# Altium PCB DIOT_Sampler.PCBDOC (part 3 of 8)
Units mm, origin at the board's own origin, x right, y up, seen from the top; angles counter-clockwise.
Board outline 221.17 x 100 mm, 4 copper layers (Top, GP1(GND), L3, Bot), stack 1.648 mm thick; 666 components, 413 nets, 2132 pads, 925 vias.
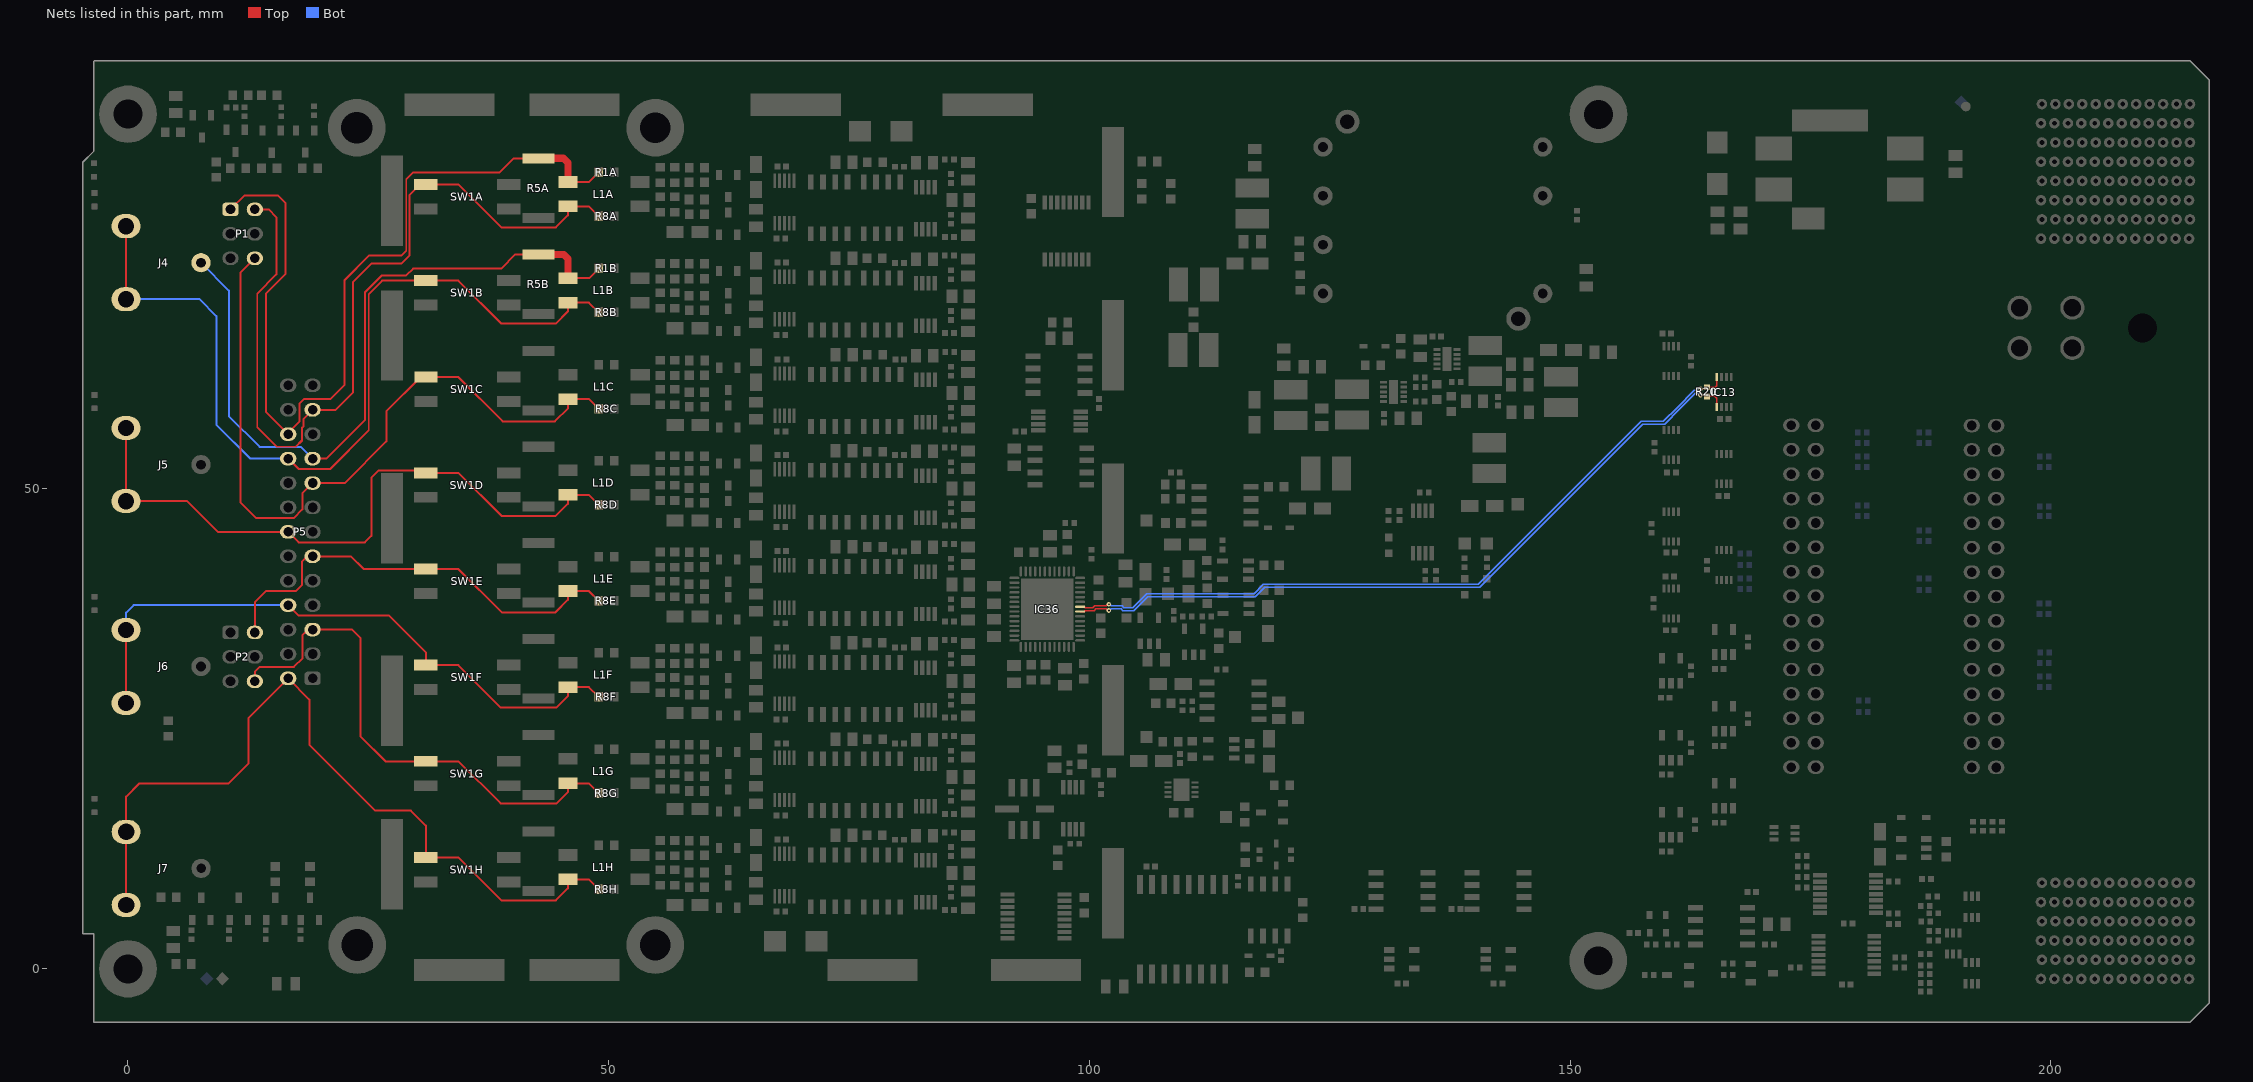
[diagram p4: the nets of this part, all layers, seen from the top]

## Part data (continued)
IC24: library part CMP-0476-00219-1, "200 mA, Low Noise, Low Dropout Negative Micropower Regulator, -1.9 to -20 V Vin, Adjustable Vout, 8-pin SON (DD-8), -40 to 125 degC, Pb-Free", Dropout Voltage(V)=0.34, Manufacturer="Linear Technology", Output Voltage=Adj, Shutdown Current(uA)=3, Code_JEDEC=MO-229, ComponentLink1Description="Manufacturer URL", ComponentLink1URL=http://www.linear.com/, ComponentLink2Description=Datasheet, ComponentLink2URL=http://cds.linear.com/docs/en/datasheet/1964fb.pdf, ComponentLink3Description="Package Specification", ComponentLink3URL=http://cds.linear.com/docs/en/packaging/DFN_8_05-08-1698.pdf, DatasheetVersion="Rev. B", Discrete Pass Element=no, Iout(mA)=200, Isupply(mA)=0.03, Mounting Technology="Surface Mount", Noise(uV)=30, Number of Outputs=1, PackageDescription="8-Pin Plastic DFN, Body 3 x 3 mm, Pitch 0.5 mm", PackageReference=DD-8, PackageVersion=Jun-10, PartNumber=LT1964EDD#PBF, PSRR(dB)=54, RoHS=TRUE, Vin Max(V)=-1.9, Vin Min(V)=-20, Vout Max(V)=-1.22, Vout Min(V)=-20
IC25: library part DC/DC_CC6-1212DF-E, "CONV DC/DC 6W DUAL 12V +-12V PCB", Manufacturer="TDK-Lambda Americas Inc.", Author=GK, Bonding=No, ComponentHeight=10.45mm, Component Type=Standard, CreateDate=17.12.2016, Device=CC6-1212DF-E, LatestRevisionDate=17.12.2016, Manufacturer Part Number=CC6-1212DF-E, Mounted=Yes, PackageDescription="CC6 Series, Body 0.900 x 0.831 x 0.335, Regulated", Part Description="CONV DC/DC 6W DUAL 12V +-12V PCB", Part Number=CC6-1212DF-E, Pin Count=7, PressFit=No, Sense=No, SMD=No, Socket=No
IC26: "200mA, Low Noise, Low Dropout Negative Micropower Regulator", Case=SOT23-5, Manufacturer="LINEAR TECHNOLOGY", Author="CERN DEM JLC", Bonding=No, ComponentHeight=1mm, Component Type=Standard, CreateDate=05.05.2009, Device=LT1964ES5-SD#TRMPBF, HelpURL=\\cern.ch\dfs\Applications\Altium\Datasheets\LT1964ES5-SD#TRMPBF.pdf, LatestRevisionDate=05.05.2009, Manufacturer Part Number=LT1964ES5-SD#TRMPBF, Mounted=Yes, PackageDescription="SOT23, 0.95mm pitch; 5 pin, 1.75mm W X 3.00mm L, IPC Medium Density", Part Description="-1.22V to -20V, 200mA, Low Noise, Low Dropout Negative Micropower Regulator", Part Number=LT1964ES5-SD#TRMPBF, Pin Count=5, PressFit=No, Sense=No, SMD=Yes, Socket=No
IC27: "Dual Operational Amplifier", Case=SOIC8, Manufacturer="TEXAS INSTRUMENTS", Author="CERN DEM JLC", Bonding=No, ComponentHeight=1.75mm, Component Type=Standard, CreateDate=22.10.2013, Device=LM393AD, HelpURL=\\cern.ch\dfs\Applications\Altium\Datasheets\LM393AD.pdf, LatestRevisionDate=22.10.2013, Manufacturer Part Number=LM393AD, Mounted=Yes, PackageDescription="SOIC 8, Pitch 1.27mm - Body 4x5mm, IPC Medium Density", Part Description="Dual Differential Comparator", Part Number=LM393AD, Pin Count=8, PressFit=No, Sense=No, SMD=Yes, Socket=No
IC28 IC31: "4.75-28VDC to 1-6VDC, 500mA Step-Down Converter With Sleep Mode", Case=SON10, Manufacturer="TEXAS INSTRUMENTS", Author="CERN DEM JMW", Bonding=No, ComponentHeight=0.8mm, Component Type=Standard, CreateDate=11.08.2015, Device=TPS62175DQC, HelpURL=\\cern.ch\dfs\Applications\Altium\Datasheets\TPS62175DQC.pdf, LatestRevisionDate=11.08.2015, Manufacturer Part Number=TPS62175DQC, Mounted=Yes, PackageDescription="SON, 10-Leads, Body 2x3mm, Pitch 0.5mm, Thermal Pad 0.94x2.5mm, IPC Medium Density", Part Description="4.75-28VDC to 1-6VDC, 500mA Step-Down Converter With Sleep Mode", Part Number=TPS62175DQC, Pin Count=11, PressFit=No, Sense=No, SMD=Yes, Socket=No
IC33: library part REF_LTC6655CHLS8-4.096, "4.096, 1uA Precision Voltage Reference", Case=8-CLCC, Manufacturer="LINEAR TECHNOLOGY", Manufacturer Part Number=LTC6655CHLS8-4.096#PBF, Author=GK, Bonding=No, Component Type=Standard, ComponentHeight=1mm, CreateDate=2011-10-10, Device=LTC6655CHLS8-4.096, HelpURL=\\cern.ch\dfs\Applications\Altium\Datasheets\LT6656ACS6-3.3#TRMPBF.pdf, LatestRevisionDate=2011-10-10, Mounted=Yes, PackageDescription="LCC, 8-Pins, Body 5,00x5,00mmx1,45mm, Pitch 1,27mm, IPC Medium Density", Part Description="4.096V, 0.05%, 10ppm/°C, 1uA Precision Voltage Reference", Part Number=LTC6655CHLS8-4.096#PBF, Pin Count=8, PressFit=No, Sense=No, SMD=Yes, Socket=No
IC34: library part REF_LTC6655, "0.25ppm Noise, Low Drift Precision Buffered Voltage Reference", Case=SSOP8, Manufacturer="LINEAR TECHNOLOGY", Author=GK, Bonding=No, ComponentHeight=1.1mm, Component Type=Standard, CreateDate=07.06.2012, Device=LTC6655BHMS8-4.096#PBF, HelpURL=\\cern.ch\dfs\Applications\Altium\Datasheets\LTC6655BHMS8-5#PBF.pdf, LatestRevisionDate=07.06.2012, Manufacturer Part Number=LTC6655BHMS8-4.096#PBF, Mounted=Yes, PackageDescription="SOP, 8-Leads, Body 3.1x3.1mm (max), Pitch 0.65mm, IPC Medium Density", Part Description="4.096V, 0.25ppm Noise, Low Drift Precision Buffered Voltage Reference", Part Number=LTC6655BHMS8-4.096#PBF, Pin Count=8, PressFit=No, Sense=No, SMD=Yes, Socket=No
IC36: library part ADC_LTC2320HUKG-16, "Octal, 16-Bit, 1.5Msps/Ch  Simultaneous Sampling ADC", Case=QFP48, Manufacturer="LINEAR TECHNOLOGY", Author=GK, Bonding=No, ComponentHeight=0.8, Component Type=Standard, CreateDate=10.01.2017, Device=LTC2320HUKG-16#PBF, HelpURL=\\cern.ch\dfs\Applications\Altium\Datasheets\LTC2335CLX-18#PBF.pdf, LatestRevisionDate=10.01.2017, Manufacturer Part Number=LTC2320HUKG-16#PBF, Mounted=Yes, PackageDescription="QFN, 52-Leads, Body 7.00x8.00mm, Pitch 0.50mm, Thermal Pad 5.41x6.40mm, IPC Low Density", Part Description="Octal, 16-Bit, 1.5Msps/Ch  Simultaneous Sampling ADC", Part Number=LTC2320HUKG-16#PBF, Pin Count=48, PressFit=No, Sense=No, SMD=Yes, Socket=No
IC37 IC46: Case=TSSOP14, Manufacturer="NXP SEMICONDUCTORS", Author="CERN DEM JLC", Bonding=No, Component Type=Standard, ComponentHeight=1.1mm, CreateDate=2014-11-19, Device=74HC4066PW, HelpURL=\\cern.ch\dfs\Applications\Altium\Datasheets\74HC4066PW.pdf, LatestRevisionDate=2014-11-19, Manufacturer Part Number=74HC4066PW, Mounted=Yes, PackageDescription="SOP, 14-Leads, Body 4.4x5mm (max), Pitch 0.65mm, IPC Medium Density", Part Description="Quad Single-Pole Single-Throw Analog Switch", Part Number=74HC4066PW, Pin Count=14, PressFit=No, SMD=Yes, Socket=No, Table="Standard Logic"
IC39: "LinCMOS Timer", Case=SOIC8, Manufacturer="TEXAS INSTRUMENTS", Author="CERN DEM JMW", Bonding=No, Component Type=Standard, ComponentHeight=1.75mm, CreateDate=23.08.2016, Device=TLC555ID, HelpURL=\\cern.ch\dfs\Applications\Altium\Datasheets\TLC555ID.pdf, LatestRevisionDate=23.08.2016, Manufacturer Part Number=TLC555ID, Mounted=Yes, PackageDescription="SOIC 8, Pitch 1.27mm, Body 4x5mm, IPC Medium Density", Part Description="LinCMOS Timer", Part Number=TLC555ID, Pin Count=8, PressFit=No, Sense=No, SMD=Yes, Socket=No
IC40: "Digital Temperature Sensor and Thermal Watchdog with Two-Wire Interface", Case=SSOP8, Manufacturer="TEXAS INSTRUMENTS", Author="CERN DEM JLC", Bonding=No, Component Type=Standard, ComponentHeight=1.09mm, CreateDate=15.10.2012, Device=LM75AIMM/NOPB, HelpURL=\\cern.ch\dfs\Applications\Altium\Datasheets\LM75AIMM-NOPB.pdf, LatestRevisionDate=15.10.2012, Manufacturer Part Number=LM75AIMM/NOPB, Mounted=Yes, PackageDescription="SOP, 0.65mm pitch; 8 pin,3.00mm W X 3.00mm L X 1.09mm H bodyI, PC Medium Density", Part Description="-25° to +100°C ±2°C Digital Temperature Sensor and Thermal Watchdog with Two-Wire Interface", Part Number=LM75AIMM/NOPB, Pin Count=8, PressFit=No, Sense=No, SMD=Yes, Socket=No
IC41: "500mA Peak Output LDO Regulator", Case=SOT23-5, Manufacturer="MICROCHIP TECHNOLOGY", Author="CERN DEM WB", Bonding=No, Component Type=Standard, ComponentHeight=1.45mm, CreateDate=2019-04-16, Device=MIC5219-3.3YM5, HelpURL=\\cern.ch\dfs\Applications\Altium\Datasheets\MIC5219-3.3YM5.pdf, LatestRevisionDate=2019-04-16, Manufacturer Part Number=MIC5219-3.3YM5, Mounted=Yes, PackageDescription="SOT, 0.95mm pitch; 5 pin, 1.60mm W X 2.90mm L X 1.45mm H body, IPC Medium Density", Part Description="3.3V 500mA Peak Output Low Drop-Out  (LDO) Regulator", Part Number=MIC5219-3.3YM5, Pin Count=5, PressFit=No, Sense=No, SMD=Yes, Socket=No
IC43 IC44: "1.7V-5.5V, 2K I2C™ Serial EEPROMs with EUI-48™ Node Identity", Case=SOIC8, Manufacturer="MICROCHIP TECHNOLOGY", Author="CERN DEM MR", Bonding=No, Component Type=Standard, ComponentHeight=1.75mm, CreateDate=19.07.2016, Device=24AA025E48-I/SN, HelpURL=\\cern.ch\dfs\Applications\Altium\Datasheets\24AA025E48-I-SN.pdf, LatestRevisionDate=19.07.2016, Manufacturer Part Number=24AA025E48-I/SN, Mounted=Yes, PackageDescription="SOIC 8, Pitch 1.27mm - Body 4x5mm, IPC Medium Density", Part Description="1.7V-5.5V, 2K I2C™ Serial EEPROMs with EUI-48™ Node Identity", Part Number=24AA025E48-I/SN, Pin Count=8, PressFit=No, Sense=No, SMD=Yes, Socket=No
J1 J2: library part 3M_N2530-6002RB, "Connector 30 Male", Manufacturer=3M, Manufacturer Part Number=N2530-6002RB, Author="CERN DEM JLC", ComponentHeight=10.03mm, Component Type=Standard, CreateDate=11.02.2009, Family="Header 30", HelpURL=\\cern.ch\dfs\Applications\Altium\Datasheets\3M_N2530-6002RB.pdf, LatestRevisionDate=11.08.2009, Mounted=Yes, Part Description="30 Contacts - Straight .100'' x .100'' Low Profile Four-Wall Header, 2500 Series", Part Number=3M_N2530-6002RB, Pin Count=30, PressFit=No, Sense=No, SMD=No, Socket=No, Status=None
J4 J5 J6 J7: library part MOLEX_73251-3150, Manufacturer=MOLEX, Manufacturer Part Number=73251-3150, Author="CERN DEM JLC", Component Type=Standard, CreateDate=19.09.2024, Family=BNC, HelpURL=\\cern.ch\dfs\Applications\Altium\Datasheets\MOLEX_73251-2121.pdf, LatestRevisionDate=19.09.2024, Mounted=Yes, Part Description="RF Connectors / Coaxial Connectors BNC RA PCB RECPT 50 OHM", Part Number=MOLEX_73251-3150, Pin Count=5, PressFit=No, Sense=No, SMD=No, Socket=No, Status=None
J8: library part AMPHENOL_10052825-101LF, "72 Contacts Header, 6 Columns, 4 Pairs per Column", Manufacturer=AMPHENOL, Manufacturer Part Number=10052825-101LF, Author="CERN DEM MR", ClassName=Overlapping, Component Type=Standard, ComponentHeight=15.35mm, ComponentLink1Description=Application, ComponentLink1URL=\\cern.ch\dfs\Applications\Altium\Datasheets\AMPHENOL_10052825-101LF_Application.pdf, CreateDate=19/02/2018, Family="AirMax VS", HelpURL=\\cern.ch\dfs\Applications\Altium\Datasheets\AMPHENOL_10052825-101LF.pdf, LatestRevisionDate=19/02/2018, Mounted=Yes, Part Description="72 Contacts, 2mm Pitch, 6 Columns, 4 Pairs per Column, 4 Walls, Right Angle Header", Part Number=AMPHENOL_10052825-101LF, Pin Count=72, PressFit=Yes, Sense=No, SMD=No, Socket=No, Status=None
J9: library part AMPHENOL_10052838-101LF, "96 Contacts Header, 8 Columns, 4 Pairs per Column", Manufacturer=AMPHENOL, Manufacturer Part Number=10052838-101LF, Author="CERN DEM MR", Component Type=Standard, ComponentHeight=15.35mm, ComponentLink1Description=Application, ComponentLink1URL=\\cern.ch\dfs\Applications\Altium\Datasheets\AMPHENOL_10052838-101LF_Application.pdf, CreateDate=19.02.2018, Family="AirMax VS", HelpURL=\\cern.ch\dfs\Applications\Altium\Datasheets\AMPHENOL_10052838-101LF.pdf, LatestRevisionDate=19.02.2018, Mounted=Yes, Part Description="96 Contacts, 2mm Pitch, 8 Columns, 4 Pairs per Column, 4 Walls, Right Angle Header", Part Number=AMPHENOL_10052838-101LF, Pin Count=96, PressFit=Yes, Sense=No, SMD=No, Socket=No, Status=None
J10: library part MOLEX_39-30-0040, "Connector 4 Male", Manufacturer=MOLEX, Manufacturer Part Number=39-30-0040, Author="CERN DEM JLC", Component Type=Standard, ComponentHeight=11.4mm, CreateDate=2018-10-02, Family="Mini-Fit Jr.™", HelpURL=\\cern.ch\dfs\Applications\Altium\Datasheets\MOLEX_39-30-0040.pdf, LatestRevisionDate=2018-10-02, Mounted=Yes, Part Description="4.20mm (.165\") Pitch Mini-Fit Jr. Header, Dual Row, Right Angle with Snap-in Plastic Peg PCB Lock, 4 Circuits", Part Number=MOLEX_39-30-0040, Pin Count=4, PressFit=No, Sense=No, SMD=No, Socket=No, Status=None
L1A L1B L1C L1D L1E L1F L1G L1H: library part IND_6.5MH_50%_WURTH_WE-SL2-744229, "Inductor Common Mode", Manufacturer="WURTH ELEKTRONIK", Manufacturer Part Number=744229, Power=400mA, Resistance=0.95R, Tolerance=±50%, Author="CERN DEM JLC", ComponentHeight=5.3mm, Component Type=Standard, CreateDate=01.10.2012, HelpURL=\\cern.ch\dfs\Applications\Altium\Datasheets\IND_WURTH_WE-SL2_744229.pdf, LatestRevisionDate=15.10.2012, Mounted=Yes, Part Description="Common Mode SMD Line Filter (WE-SL2 Serie)", Part Number=IND_6.5MH_50%_WURTH_WE-SL2-744229, Pin Count=4, Sense=No, SMD=Yes, Socket=No, Status=None
L2 L3 L4 L5 L6 L7 L8 L9 L10: library part IND_10UH_10%_MURATA-PS_8400, "Inductor With Core", Manufacturer="MURATA POWER SOLUTIONS", Manufacturer Part Number=84103C, Power=950mA, Resistance=0.24R, Tolerance=±10%, Author="CERN DEM JLC", ComponentHeight=2.9mm, Component Type=Standard, CreateDate=02.07.2012, HelpURL=\\cern.ch\dfs\Applications\Altium\Datasheets\IND_MURATA-PS_8400.pdf, LatestRevisionDate=02.07.2012, Mounted=Yes, Part Description="Miniature Surface Mount Power Inductor (8400 Serie)", Part Number=IND_10UH_10%_MURATA-PS_8400, Pin Count=2, Sense=No, SMD=Yes, Socket=No, Status=None
LD6 LD7 LD8: library part LED_KINGBRIGHT_KPH-1608CGCK, "LED Green 1C 2A", Manufacturer=KINGBRIGHT, Manufacturer Part Number=KPH-1608CGCK, Author="CERN DEM JLC", Bonding=No, Color=Green, Component Type=Standard, ComponentHeight=0.65mm, CreateDate=03.07.2017, HelpURL=\\cern.ch\dfs\Applications\Altium\Datasheets\LED_KINGBRIGHT_KPH-1608CGCK.pdf, LatestRevisionDate=03.07.2017, Mounted=Yes, PackageDescription="SMT Green LED, Case 0603, Body L 1.6 x W 0.8mm H 0.65mm", Part Description="SMD Green LED, Case 1.6mmX0.8mm(0603), 0.65mm Thickness", Part Number=LED_KINGBRIGHT_KPH-1608CGCK, Pin Count=2, PressFit=No, Sense=No, SMD=Yes, Socket=No
M1 M2 M3 M4: library part PLATED_HOLE3.0_PAD6.0, "Single Terminal Socket", Author="CERN DEM JLC", Component Type="Standard (No BOM)", ComponentHeight=0mm, CreateDate=26.05.2008, Family="Plated Hole", LatestRevisionDate=26.05.2008, Mounted=No, PackageDescription="Plated Through Hole: Hole Dia.=3.0mm Pad Dia.=6.0mm", Part Description="Plated Through Hole: Hole Dia.=3.0mm Pad Dia.=6.0mm", Part Number=PLATED_HOLE3.0_PAD6.0, Pin Count=1, SMD=No, Socket=No, Status=None, Table=Pads
NUT1 NUT2: library part BOSSARD_BN81-1400401_v, "Nut", Manufacturer=BOSSARD, Manufacturer Part Number="BN81 Art.1400401", Author="CERN DEM JMW", Component Type=Mechanical, ComponentHeight=2.4mm, CreateDate=18.06.2015, HelpURL=\\cern.ch\dfs\Applications\Altium\Datasheets\BOSSARD_BN81-1400401.pdf, LatestRevisionDate=18.06.2015, Mounted=Yes, PackageDescription="M3 Hexagon Nut ~0,8d, DIN 555, Polyamide PA 6.6", Part Description="M3 Hexagon Nut ~0,8d, DIN 555, Polyamide PA 6.6", Part Number=BOSSARD_BN81-1400401_v, Pin Count=0, PressFit=No, Sense=No, SMD=No, Socket=No, Status=None
P1 P2: "WR-PHD Pin Header, THT, Vertical, pitch 2.54mm, 2 Row, 6P", Contact Resistance=20mOhm, Manufacturer="Wurth Elektronik", Operating Temperature Max=105°C, Operating Temperature Min=-40°C, Rated Current=3A, Withstanding Voltage=500V, Working Voltage=250V, Category="Board-to-Board Connectors", ComponentLink1Description="Website Link", ComponentLink1URL=https://www.we-online.com/redexpert/article/61300621121?ad, ComponentLink2Description="Datasheet Link", ComponentLink2URL=https://www.we-online.com/redexpert/spec/61300621121?ad, Gender="Pin Header", Manufacturer Part Number=61300621121, Match Code=WR-PHD, Mount="Through Hole", Number of Pins=6, Number of Rows=2, Orientation=Vertical, Packaging=Bag, Pitch=2.54mm
P5: "WR-PHD Pin Header, THT, Vertical, pitch 2.54mm, 2 Row, 26P", Contact Resistance=20mOhm, Manufacturer="Wurth Elektronik", Operating Temperature Max=105°C, Operating Temperature Min=-40°C, Rated Current=3A, Withstanding Voltage=500V, Working Voltage=250V, Category="Board-to-Board Connectors", ComponentLink1Description="Website Link", ComponentLink1URL=https://www.we-online.com/redexpert/article/61302621121?ad, ComponentLink2Description="Datasheet Link", ComponentLink2URL=https://www.we-online.com/redexpert/spec/61302621121?ad, Gender="Pin Header", Manufacturer Part Number=61302621121, Match Code=WR-PHD, Mount="Through Hole", Number of Pins=26, Number of Rows=2, Orientation=Vertical, Packaging=Bag, Pitch=2.54mm
R1A R1B R1C R1D R1E R1F R1G R1H R8A R8B R8C R8D R8E R8F R8G R8H R41 R42 R56 R86: library part R0603_NO-VALUE, "Resistor", Case=0603, Author="CERN DEM JLC", Component Type=Standard, CreateDate=03.12.2007, HelpURL=Undefined, LatestRevisionDate=13.03.2008, Manufacturer=Undefined, Manufacturer1 ComponentHeight=Undefined, Manufacturer1 Example=Undefined, Manufacturer1 Part Number=Undefined, Manufacturer Part Number=R0603_NO-VALUE, Mounted=No, Part Description="Reserved Footprint For a 0603 (1608) Chip Resistor", Part Number=R0603_NO-VALUE, Pin Count=2, Sense=No, SMD=Yes, Socket=No, Status=None
R2A R2B R2C R2D R2E R2F R2G R2H R9A R9B R9C R9D R9E R9F R9G R9H R46 R47: library part R0603_0R_JUMPER, "Resistor", Case=0603, Manufacturer=GENERIC, Manufacturer1 ComponentHeight=0.55mm, Manufacturer1 Example="NIC COMPONENT", Manufacturer1 Part Number=NRC06Z0, Author="CERN DEM JLC", Component Type=Standard, CreateDate=03.12.2007, HelpURL=\\cern.ch\dfs\Applications\Altium\Datasheets\R0603_NIC_NRC.pdf, LatestRevisionDate=13.03.2008, Manufacturer Part Number=R0603_0R_JUMPER, Mounted=Yes, Part Description="1A (0.05R Max DC Resistance) Zero Ohm Jumper", Part Number=R0603_0R_JUMPER, Pin Count=2, Sense=No, SMD=Yes, Socket=No, Status=Preferred
  R46 R47: PressFit=No
R3A R3B R3C R3D R3E R3F R3G R3H R10A R10B R10C R10D R10E R10F R10G R10H: library part R0603_1K8_1%_0.1W_100PPM, "Resistor - 1%", Case=0603, Manufacturer=GENERIC, Manufacturer1 ComponentHeight=0.55mm, Manufacturer1 Example="NIC COMPONENT", Manufacturer1 Part Number=NRC06F1801TRF, Power=0.1W, Tolerance=±1%, Author="CERN DEM JLC", Component Type=Standard, CreateDate=03.12.2007, HelpURL=\\cern.ch\dfs\Applications\Altium\Datasheets\R0603_NIC_NRC.pdf, LatestRevisionDate=13.03.2008, Manufacturer Part Number=R0603_1K8_1%_0.1W_100PPM, Mounted=Yes, Part Description="General Purpose Thick Film Chip Resistor", Part Number=R0603_1K8_1%_0.1W_100PPM, Pin Count=2, Sense=No, SMD=Yes, Socket=No, Status=Preferred, TC=±100ppm/°C
R4A R4B R4C R4D R4E R4F R4G R4H R11A R11B R11C R11D R11E R11F R11G R11H: library part R0603_100K_1%_0.1W_100PPM, "Resistor - 1%", Case=0603, Manufacturer=GENERIC, Manufacturer1 ComponentHeight=0.55mm, Manufacturer1 Example="NIC COMPONENT", Manufacturer1 Part Number=NRC06F1003TRF, Power=0.1W, Tolerance=±1%, Author="CERN DEM JLC", Component Type=Standard, CreateDate=03.12.2007, HelpURL=\\cern.ch\dfs\Applications\Altium\Datasheets\R0603_NIC_NRC.pdf, LatestRevisionDate=13.03.2008, Manufacturer Part Number=R0603_100K_1%_0.1W_100PPM, Mounted=Yes, Part Description="General Purpose Thick Film Chip Resistor", Part Number=R0603_100K_1%_0.1W_100PPM, Pin Count=2, Sense=No, SMD=Yes, Socket=No, Status=Preferred, TC=±100ppm/°C
R5A R5B R5C R5D R5E R5F R5G R5H: library part R2512_49R9_1%_1W_100PPM_VISHAY_CRCW, "Resistor - 1%", Case=2512, Manufacturer="VISHAY DRALORIC", Manufacturer Part Number=CRCW251249R9FKEG, Power=1W, Tolerance=±1%, Author="CERN DEM JLC", ComponentHeight=0.7mm, Component Type=Standard, CreateDate=22.05.2012, HelpURL=\\cern.ch\dfs\Applications\Altium\Datasheets\R2512_VISHAY_CRCW2512.pdf, LatestRevisionDate=22.05.2012, Mounted=Yes, Part Description="Thick Film Chip Resistor", Part Number=R2512_49R9_1%_1W_100PPM_VISHAY_CRCW, Pin Count=2, PressFit=No, Sense=No, SMD=Yes, Socket=No, Status=None, TC=±100ppm/°C
R6A R6B R6C R6D R6E R6F R6G R6H R12A R12B R12C R12D R12E R12F R12G R12H: library part R0402_51R_1%_0.0625W_100PPM, "Resistor - 1%", Case=0402, Manufacturer=GENERIC, Manufacturer1 ComponentHeight=0.4mm, Manufacturer1 Example="YAGEO PHYCOMP", Manufacturer1 Part Number=232270675109L, Power=0.0625W, Tolerance=±1%, Author="CERN DEM JLC", Component Type=Standard, CreateDate=03.12.2007, HelpURL=\\cern.ch\dfs\Applications\Altium\Datasheets\R0402_Phycomp_RC0402.pdf, LatestRevisionDate=17.10.2012, Manufacturer Part Number=R0402_51R_1%_0.0625W_100PPM, Mounted=Yes, Part Description="General Purpose Thick Film Chip Resistor", Part Number=R0402_51R_1%_0.0625W_100PPM, Pin Count=2, PressFit=No, Sense=No, SMD=Yes, Socket=No, Status="Not Recommended", TC=±100ppm/°C
R7A R7B R7C R7D R7E R7F R7G R7H R51 R54 R61 R64 R67 R83: library part R0603_24K_1%_0.1W_100PPM, "Resistor - 1%", Case=0603, Manufacturer=GENERIC, Manufacturer1 ComponentHeight=0.55mm, Manufacturer1 Example="NIC COMPONENT", Manufacturer1 Part Number=NRC06F2402TRF, Power=0.1W, Tolerance=±1%, Author="CERN DEM JLC", Component Type=Standard, CreateDate=03.12.2007, HelpURL=\\cern.ch\dfs\Applications\Altium\Datasheets\R0603_NIC_NRC.pdf, LatestRevisionDate=13.03.2008, Manufacturer Part Number=R0603_24K_1%_0.1W_100PPM, Mounted=Yes, Part Description="General Purpose Thick Film Chip Resistor", Part Number=R0603_24K_1%_0.1W_100PPM, Pin Count=2, Sense=No, SMD=Yes, Socket=No, Status=Preferred, TC=±100ppm/°C
  R7A R7B R7C R7D R7E R7F R7G R7H R83: PressFit=No
R13A R13B R13C R13D R13E R13F R13G R13H R60: library part R0402_2K4_1%_0.0625W_100PPM, "Resistor - 1%", Case=0402, Manufacturer=GENERIC, Manufacturer1 ComponentHeight=0.4mm, Manufacturer1 Example="YAGEO PHYCOMP", Manufacturer1 Part Number=232270672402L, Power=0.0625W, Tolerance=±1%, Author="CERN DEM JLC", Component Type=Standard, CreateDate=03.12.2007, HelpURL=\\cern.ch\dfs\Applications\Altium\Datasheets\R0402_Phycomp_RC0402.pdf, LatestRevisionDate=17.10.2012, Manufacturer Part Number=R0402_2K4_1%_0.0625W_100PPM, Mounted=Yes, Part Description="General Purpose Thick Film Chip Resistor", Part Number=R0402_2K4_1%_0.0625W_100PPM, Pin Count=2, PressFit=No, Sense=No, SMD=Yes, Socket=No, Status="Not Recommended", TC=±100ppm/°C
R14 R15 R16 R17 R18 R19 R20 R21 R22 R23 R24 R79: library part R0402_100R_1%_0.1W_100PPM, "Resistor - 1%", Case=0402, Manufacturer=GENERIC, Manufacturer1 ComponentHeight=0.4mm, Manufacturer1 Example=PANASONIC, Manufacturer1 Part Number=ERJ2RKF1000X, Manufacturer Part Number=R0402_100R_1%_0.1W_100PPM_50V, Power=0.1W, Tolerance=±1%, Voltage=50V, Author="CERN DEM JLC", Component Type=Standard, CreateDate=12.12.2013, HelpURL=\\cern.ch\dfs\Applications\Altium\Datasheets\R0402_PANASONIC_ERJ2RK.pdf, LatestRevisionDate=03.03.2015, Mounted=Yes, Part Description="General Purpose Thick Film Chip Resistor", Part Number=R0402_100R_1%_0.1W_100PPM, Pin Count=2, Sense=No, SMD=Yes, Socket=No, Status="Not recommended", TC=±100ppm/°C
R25 R27 R29 R31 R33 R36 R39 R43 R59 R102 R103 R104 R105 R106 R107 R109 R113 R115 R118: library part R0402_10K_1%_0.0625W_100PPM, "Resistor - 1%", Case=0402, Manufacturer=GENERIC, Manufacturer1 ComponentHeight=0.4mm, Manufacturer1 Example="YAGEO PHYCOMP", Manufacturer1 Part Number=232270671003L, Power=0.0625W, Tolerance=±1%, Author="CERN DEM JLC", Component Type=Standard, CreateDate=03.12.2007, HelpURL=\\cern.ch\dfs\Applications\Altium\Datasheets\R0402_Phycomp_RC0402.pdf, LatestRevisionDate=17.10.2012, Manufacturer Part Number=R0402_10K_1%_0.0625W_100PPM, Mounted=Yes, Part Description="General Purpose Thick Film Chip Resistor", Part Number=R0402_10K_1%_0.0625W_100PPM, Pin Count=2, Sense=No, SMD=Yes, Socket=No, TC=±100ppm/°C
  R25 R27 R29 R31 R33 R36 R39 R43: Status="Not recommended"
  R59 R102 R103 R104 R105 R106 R107 R109 R113 R115 R118: PressFit=No, Status="Not Recommended"
R26 R28 R30 R32 R34 R35 R37 R38 R40 R44: library part R0603_220R_1%_0.1W_100PPM, "Resistor - 1%", Case=0603, Manufacturer=GENERIC, Manufacturer1 ComponentHeight=0.55mm, Manufacturer1 Example="NIC COMPONENT", Manufacturer1 Part Number=NRC06F2200TRF, Power=0.1W, Tolerance=±1%, Author="CERN DEM JLC", Component Type=Standard, CreateDate=03.12.2007, HelpURL=\\cern.ch\dfs\Applications\Altium\Datasheets\R0603_NIC_NRC.pdf, LatestRevisionDate=13.03.2008, Manufacturer Part Number=R0603_220R_1%_0.1W_100PPM, Mounted=Yes, Part Description="General Purpose Thick Film Chip Resistor", Part Number=R0603_220R_1%_0.1W_100PPM, Pin Count=2, Sense=No, SMD=Yes, Socket=No, Status=Preferred, TC=±100ppm/°C
R48 R90 R91 R92 R93 R94 R95 R96 R97 R98 R99: library part R0402_22R_1%_0.0625W_100PPM, "Resistor - 1%", Case=0402, Manufacturer=GENERIC, Manufacturer1 ComponentHeight=0.4mm, Manufacturer1 Example="YAGEO PHYCOMP", Manufacturer1 Part Number=232270672209L, Power=0.0625W, Tolerance=±1%, Author="CERN DEM JLC", Component Type=Standard, CreateDate=03.12.2007, HelpURL=\\cern.ch\dfs\Applications\Altium\Datasheets\R0402_Phycomp_RC0402.pdf, LatestRevisionDate=17.10.2012, Manufacturer Part Number=R0402_22R_1%_0.0625W_100PPM, Mounted=Yes, Part Description="General Purpose Thick Film Chip Resistor", Part Number=R0402_22R_1%_0.0625W_100PPM, Pin Count=2, PressFit=No, Sense=No, SMD=Yes, Socket=No, Status="Not Recommended"
  R48 R90 R91 R92 R94 R96 R97 R99: TC=±100ppm/°C
R49 R50: library part "R0805_10M_1%_0.125W_100PPM_VISHAY_CRCW e3", "Resistor - 1%", Case=0805, Manufacturer="VISHAY DALE", Manufacturer Part Number=CRCW080510M0FKEA, Power=0.125W, Tolerance=±1%, Author="CERN DEM BC", Component Type=Standard, ComponentHeight=0.5mm, CreateDate=2019-11-12, HelpURL="\\cern.ch\dfs\Applications\Altium\Datasheets\R0805_VISHAY_CRCW e3.pdf", LatestRevisionDate=2019-11-12, Mounted=Yes, Part Description="150V, Standard Thick Film Chip Resistor", Part Number="R0805_10M_1%_0.125W_100PPM_VISHAY_CRCW e3", Pin Count=2, PressFit=No, Sense=No, SMD=Yes, Socket=No, Status=None, TC=±100ppm/°C
R52 R53 R63 R108 R112: library part R0603_2K7_1%_0.1W_100PPM, "Resistor - 1%", Case=0603, Manufacturer=GENERIC, Manufacturer1 ComponentHeight=0.55mm, Manufacturer1 Example="YAGEO PHYCOMP", Manufacturer1 Part Number=RC0603FR-072K7L, Power=0.1W, Tolerance=±1%, Author="CERN DEM JLC", Component Type=Standard, CreateDate=02.05.2011, HelpURL=\\cern.ch\dfs\Applications\Altium\Datasheets\R0603_PHYCOMP_RC0603.pdf, LatestRevisionDate=02.05.2011, Manufacturer Part Number=R0603_2K7_1%_0.1W_100PPM, Mounted=Yes, Part Description="General Purpose Thick Film Chip Resistor", Part Number=R0603_2K7_1%_0.1W_100PPM, Pin Count=2, Sense=No, SMD=Yes, Socket=No, Status=Preferred, TC=±100ppm/°C
  R108 R112: PressFit=No
R55 R65 R69 R74: library part R0402_5K1_1%_0.0625W_100PPM, "Resistor - 1%", Case=0402, Manufacturer=GENERIC, Manufacturer1 ComponentHeight=0.4mm, Manufacturer1 Example="YAGEO PHYCOMP", Manufacturer1 Part Number=232270675102L, Power=0.0625W, Tolerance=±1%, Author="CERN DEM JLC", Component Type=Standard, CreateDate=03.12.2007, HelpURL=\\cern.ch\dfs\Applications\Altium\Datasheets\R0402_Phycomp_RC0402.pdf, LatestRevisionDate=17.10.2012, Manufacturer Part Number=R0402_5K1_1%_0.0625W_100PPM, Mounted=Yes, Part Description="General Purpose Thick Film Chip Resistor", Part Number=R0402_5K1_1%_0.0625W_100PPM, Pin Count=2, PressFit=No, Sense=No, SMD=Yes, Socket=No, Status="Not Recommended", TC=±100ppm/°C
R57 R78 R80 R81 R82 R100 R110 R111 R116 R117 R120 R121 R122 R123 R124 R125 R126 R127 R128 R129 R130 R131 R132 R133 R134 R137 R138 R139 R140 R141 R142 R143 R144 R145 R146 R147 R148 R149 R150 R153 R154 R155 R156 R157: library part R0402_0R_JUMPER, "Resistor", Case=0402, Manufacturer=GENERIC, Manufacturer1 ComponentHeight=0.4mm, Manufacturer1 Example="YAGEO PHYCOMP", Manufacturer1 Part Number=232270591001L, Author="CERN DEM JLC", Component Type=Standard, CreateDate=03.12.2007, HelpURL=\\cern.ch\dfs\Applications\Altium\Datasheets\R0402_Phycomp_RC0402.pdf, LatestRevisionDate=17.10.2012, Manufacturer Part Number=R0402_0R_JUMPER, Mounted=Yes, Part Description="1A (0.05R Max DC Resistance) Zero Ohm Jumper", Part Number=R0402_0R_JUMPER, Pin Count=2, Sense=No, SMD=Yes, Socket=No
  R57 R78 R80 R81 R82 R116 R117: Status="Not recommended"
  R100 R110 R111 R120 R121 R122 R123 R124 R125 R126 R127 R128 R129 R130 R131 R132 R133 R134 R137 R138 R139 R140 R141 R142 R143 R144 R145 R146 R147 R148 R149 R150 R153 R154 R155 R156 R157: PressFit=No, Status="Not Recommended"
R58: library part R0603_36k_1%_0.1W_100PPM, "Resistor - 1%", Case=0603, Manufacturer=GENERIC, Manufacturer1 ComponentHeight=0.55mm, Manufacturer1 Example="NIC COMPONENT", Manufacturer1 Part Number=NRC06F3602TRF, Manufacturer Part Number=R0603_36K_1%_0.1W_100PPM, Power=0.1W, Tolerance=±1%, Author="CERN DEM JLC", Component Type=Standard, CreateDate=03.12.2007, HelpURL=\\cern.ch\dfs\Applications\Altium\Datasheets\R0603_NIC_NRC.pdf, LatestRevisionDate=13.03.2008, Mounted=Yes, Part Description="General Purpose Thick Film Chip Resistor", Part Number=R0603_36K_1%_0.1W_100PPM, Pin Count=2, PressFit=No, Sense=No, SMD=Yes, Socket=No, Status=Preferred, TC=±100ppm/°C
R62 R73: library part R0402_62K_1%_0.0625W_100PPM, "Resistor - 1%", Case=0402, Manufacturer=GENERIC, Manufacturer1 ComponentHeight=0.4mm, Manufacturer1 Example="YAGEO PHYCOMP", Manufacturer1 Part Number=232270676203L, Power=0.0625W, Tolerance=±1%, Author="CERN DEM JLC", Component Type=Standard, CreateDate=03.12.2007, HelpURL=\\cern.ch\dfs\Applications\Altium\Datasheets\R0402_Phycomp_RC0402.pdf, LatestRevisionDate=17.10.2012, Manufacturer Part Number=R0402_62K_1%_0.0625W_100PPM, Mounted=Yes, Part Description="General Purpose Thick Film Chip Resistor", Part Number=R0402_62K_1%_0.0625W_100PPM, Pin Count=2, PressFit=No, Sense=No, SMD=Yes, Socket=No, Status="Not Recommended", TC=±100ppm/°C
R66: library part R0603_270K_1%_0.1W_100PPM, "Resistor - 1%", Case=0603, Manufacturer=GENERIC, Manufacturer1 ComponentHeight=0.55mm, Manufacturer1 Example="NIC COMPONENT", Manufacturer1 Part Number=NRC06F2703TRF, Power=0.1W, Tolerance=±1%, Author="CERN DEM JLC", Component Type=Standard, CreateDate=03.12.2007, HelpURL=\\cern.ch\dfs\Applications\Altium\Datasheets\R0603_NIC_NRC.pdf, LatestRevisionDate=13.03.2008, Manufacturer Part Number=R0603_270K_1%_0.1W_100PPM, Mounted=Yes, Part Description="General Purpose Thick Film Chip Resistor", Part Number=R0603_270K_1%_0.1W_100PPM, Pin Count=2, Sense=No, SMD=Yes, Socket=No, Status=Preferred, TC=±100ppm/°C
R68 R77: library part R0603_82K_1%_0.1W_100PPM, "Resistor - 1%", Case=0603, Manufacturer=GENERIC, Manufacturer1 ComponentHeight=0.55mm, Manufacturer1 Example="NIC COMPONENT", Manufacturer1 Part Number=NRC06F8202TRF, Power=0.1W, Tolerance=±1%, Author="CERN DEM JLC", Component Type=Standard, CreateDate=03.12.2007, HelpURL=\\cern.ch\dfs\Applications\Altium\Datasheets\R0603_NIC_NRC.pdf, LatestRevisionDate=13.03.2008, Manufacturer Part Number=R0603_82K_1%_0.1W_100PPM, Mounted=Yes, Part Description="General Purpose Thick Film Chip Resistor", Part Number=R0603_82K_1%_0.1W_100PPM, Pin Count=2, Sense=No, SMD=Yes, Socket=No, Status=Preferred, TC=±100ppm/°C
R70: library part R0402_51K_1%_0.0625W_100PPM, "Resistor - 1%", Case=0402, Manufacturer=GENERIC, Manufacturer1 ComponentHeight=0.4mm, Manufacturer1 Example="YAGEO PHYCOMP", Manufacturer1 Part Number=232270675103L, Power=0.0625W, Tolerance=±1%, Author="CERN DEM JLC", Component Type=Standard, CreateDate=03.12.2007, HelpURL=\\cern.ch\dfs\Applications\Altium\Datasheets\R0402_Phycomp_RC0402.pdf, LatestRevisionDate=17.10.2012, Manufacturer Part Number=R0402_51K_1%_0.0625W_100PPM, Mounted=Yes, Part Description="General Purpose Thick Film Chip Resistor", Part Number=R0402_51K_1%_0.0625W_100PPM, Pin Count=2, PressFit=No, Sense=No, SMD=Yes, Socket=No, Status="Not Recommended", TC=±100ppm/°C
R71: library part R0402_47K_1%_0.0625W_100PPM, "Resistor - 1%", Case=0402, Manufacturer=GENERIC, Manufacturer1 ComponentHeight=0.4mm, Manufacturer1 Example="YAGEO PHYCOMP", Manufacturer1 Part Number=232270674703L, Power=0.0625W, Tolerance=±1%, Author="CERN DEM JLC", Component Type=Standard, CreateDate=03.12.2007, HelpURL=\\cern.ch\dfs\Applications\Altium\Datasheets\R0402_Phycomp_RC0402.pdf, LatestRevisionDate=17.10.2012, Manufacturer Part Number=R0402_47K_1%_0.0625W_100PPM, Mounted=Yes, Part Description="General Purpose Thick Film Chip Resistor", Part Number=R0402_47K_1%_0.0625W_100PPM, Pin Count=2, PressFit=No, Sense=No, SMD=Yes, Socket=No, Status="Not Recommended", TC=±100ppm/°C
R72: library part R0402_33K_1%_0.0625W_100PPM, "Resistor - 1%", Case=0402, Manufacturer=GENERIC, Manufacturer1 ComponentHeight=0.4mm, Manufacturer1 Example="YAGEO PHYCOMP", Manufacturer1 Part Number=232270673303L, Power=0.0625W, Tolerance=±1%, Author="CERN DEM JLC", Component Type=Standard, CreateDate=03.12.2007, HelpURL=\\cern.ch\dfs\Applications\Altium\Datasheets\R0402_Phycomp_RC0402.pdf, LatestRevisionDate=17.10.2012, Manufacturer Part Number=R0402_33K_1%_0.0625W_100PPM, Mounted=Yes, Part Description="General Purpose Thick Film Chip Resistor", Part Number=R0402_33K_1%_0.0625W_100PPM, Pin Count=2, PressFit=No, Sense=No, SMD=Yes, Socket=No, Status="Not Recommended", TC=±100ppm/°C
R75: library part R0402_20K_1%_0.0625W_100PPM, "Resistor - 1%", Case=0402, Manufacturer=GENERIC, Manufacturer1 ComponentHeight=0.4mm, Manufacturer1 Example="YAGEO PHYCOMP", Manufacturer1 Part Number=232270672003L, Power=0.0625W, Tolerance=±1%, Author="CERN DEM JLC", Component Type=Standard, CreateDate=03.12.2007, HelpURL=\\cern.ch\dfs\Applications\Altium\Datasheets\R0402_Phycomp_RC0402.pdf, LatestRevisionDate=17.10.2012, Manufacturer Part Number=R0402_20K_1%_0.0625W_100PPM, Mounted=Yes, Part Description="General Purpose Thick Film Chip Resistor", Part Number=R0402_20K_1%_0.0625W_100PPM, Pin Count=2, PressFit=No, Sense=No, SMD=Yes, Socket=No, Status="Not Recommended", TC=±100ppm/°C
R76: library part R0603_1K_1%_0.1W_100PPM, "Resistor - 1%", Case=0603, Manufacturer=GENERIC, Manufacturer1 ComponentHeight=0.55mm, Manufacturer1 Example="NIC COMPONENT", Manufacturer1 Part Number=NRC06F1001TRF, Power=0.1W, Tolerance=±1%, Author="CERN DEM JLC", Component Type=Standard, CreateDate=03.12.2007, HelpURL=\\cern.ch\dfs\Applications\Altium\Datasheets\R0603_NIC_NRC.pdf, LatestRevisionDate=13.03.2008, Manufacturer Part Number=R0603_1K_1%_0.1W_100PPM, Mounted=Yes, Part Description="General Purpose Thick Film Chip Resistor", Part Number=R0603_1K_1%_0.1W_100PPM, Pin Count=2, Sense=No, SMD=Yes, Socket=No, Status=Preferred, TC=±100ppm/°C
R101: library part R0402_220R_1%_0.0625W_100PPM, "Resistor - 1%", Case=0402, Manufacturer=GENERIC, Manufacturer1 ComponentHeight=0.4mm, Manufacturer1 Example="YAGEO PHYCOMP", Manufacturer1 Part Number=232270672201L, Power=0.0625W, Tolerance=±1%, Author="CERN DEM JLC", Component Type=Standard, CreateDate=03.12.2007, HelpURL=\\cern.ch\dfs\Applications\Altium\Datasheets\R0402_Phycomp_RC0402.pdf, LatestRevisionDate=17.10.2012, Manufacturer Part Number=R0402_220R_1%_0.0625W_100PPM, Mounted=Yes, Part Description="General Purpose Thick Film Chip Resistor", Part Number=R0402_220R_1%_0.0625W_100PPM, Pin Count=2, PressFit=No, Sense=No, SMD=Yes, Socket=No, Status="Not Recommended", TC=±100ppm/°C
R114: library part R0402_1K6_1%_0.0625W_100PPM, "Resistor - 1%", Case=0402, Manufacturer=GENERIC, Manufacturer1 ComponentHeight=0.4mm, Manufacturer1 Example="YAGEO PHYCOMP", Manufacturer1 Part Number=232270671602L, Power=0.0625W, Tolerance=±1%, Author="CERN DEM JLC", Component Type=Standard, CreateDate=03.12.2007, HelpURL=\\cern.ch\dfs\Applications\Altium\Datasheets\R0402_Phycomp_RC0402.pdf, LatestRevisionDate=17.10.2012, Manufacturer Part Number=R0402_1K6_1%_0.0625W_100PPM, Mounted=Yes, Part Description="General Purpose Thick Film Chip Resistor", Part Number=R0402_1K6_1%_0.0625W_100PPM, Pin Count=2, PressFit=No, Sense=No, SMD=Yes, Socket=No, Status="Not Recommended", TC=±100ppm/°C
R119: library part R0402_1K_1%_0.0625W_100PPM, "Resistor - 1%", Case=0402, Manufacturer=GENERIC, Manufacturer1 ComponentHeight=0.4mm, Manufacturer1 Example="YAGEO PHYCOMP", Manufacturer1 Part Number=232270671002L, Power=0.0625W, Tolerance=±1%, Author="CERN DEM JLC", Component Type=Standard, CreateDate=03.12.2007, HelpURL=\\cern.ch\dfs\Applications\Altium\Datasheets\R0402_Phycomp_RC0402.pdf, LatestRevisionDate=17.10.2012, Manufacturer Part Number=R0402_1K_1%_0.0625W_100PPM, Mounted=Yes, Part Description="General Purpose Thick Film Chip Resistor", Part Number=R0402_1K_1%_0.0625W_100PPM, Pin Count=2, PressFit=No, Sense=No, SMD=Yes, Socket=No, Status="Not Recommended", TC=±100ppm/°C
RN1A RN1B RN1C RN1D RN1E RN1F RN1G RN1H RN2A RN2B RN2C RN2D RN2E RN2F RN2G RN2H RN3 RN4: library part RN_10K_5K_VISHAY_AORN2-1AT3, "DIL8 Resistor Network 4 Resistors 10k-5k-5k-10k 0.1%", Case=SOIC8, Manufacturer="VISHAY DALE", Manufacturer Part Number=AORN2-1AT3, Power=4x0.1W, Tolerance=0.1%, Author="CERN DEM JLC", ComponentHeight=1.73mm, Component Type=Standard, CreateDate=20.02.2017, HelpURL=\\cern.ch\dfs\Applications\Altium\Datasheets\RN_VISHAY_AORN.pdf, LatestRevisionDate=20.02.2017, Mounted=Yes, Part Description="Dual-In-Line Thin Film Precision Automotive Resistors Network, (4 Isolated) - AORN Series", Part Number=RN_10K_5K_VISHAY_AORN2-1AT3, Pin Count=8, PressFit=No, Sense=No, SMD=Yes, Socket=No, TC=±25ppm/°C
SCREW1 SCREW2: library part BOSSARD_BN5687-3061606_v, "Screw", Manufacturer=BOSSARD, Manufacturer Part Number="BN5687 Art.3061606", Author="CERN DEM JLC", Component Type=Mechanical, ComponentHeight=2.4mm, CreateDate=07.02.2013, HelpURL=\\cern.ch\dfs\Applications\Altium\Datasheets\BOSSARD_BN5687-3061606.pdf, LatestRevisionDate=07.02.2013, Mounted=Yes, PackageDescription="M3 L=8mm Hexalobular Socket Pan Head Screw, Fully Threaded - Stainless Steel A2", Part Description="M3 L=8mm Hexalobular Socket Pan Head Screw, Fully Threaded, Stainless Steel A2", Part Number=BOSSARD_BN5687-3061606_v, Pin Count=0, PressFit=No, Sense=No, SMD=No, Socket=No, Status=None
Standoff1 Standoff2: library part SAMTEC_SO-1115-03-02-02-N, "Standoff Male-Female", Manufacturer=SAMTEC, Manufacturer Part Number=SO-1115-03-02-02-N, Author="CERN DEM BC", Component Type=Mechanical, ComponentHeight=11.15mm, CreateDate=21.07.2020, HelpURL=\\cern.ch\dfs\Applications\Altium\Datasheets\SAMTEC_SO-1115-03-02-02-N.pdf, LatestRevisionDate=21.07.2020, Mounted=Yes, PackageDescription="11.15mm Length, Precision Board Stacking Standoff M3 Male/Female", Part Description="11.15mm Length, Precision Board Stacking Standoff M3 Male/Female", Part Number=SAMTEC_SO-1115-03-02-02-N, Pin Count=1, PressFit=No, Sense=No, SMD=No, Socket=No, Status=None
SW1A SW1B SW1C SW1D SW1E SW1F SW1G SW1H: library part SW_CTS_204-121ST, "2x SPST DIP Switch 1NO + 1NF", Manufacturer=CTS, Manufacturer Part Number=204-121ST, Author="CERN DEM JLC", ComponentHeight=10.36mm, Component Type=Standard, CreateDate=28.08.2014, Family=Switch, HelpURL=\\cern.ch\dfs\Applications\Altium\Datasheets\SW_CTS_204-121ST.pdf, LatestRevisionDate=28.08.2014, Mounted=Yes, PackageDescription="Body 7.26 x 9.78mm, 2x SPST DIP, 1NO + 1NF Switch, CTS 204 Series", Part Description="Coupled SPST DIP Switch, 1NO + 1NF, CTS 204 Series", Part Number=SW_CTS_204-121ST, Pin Count=4, PressFit=No, Sense=No, SMD=Yes, Socket=No, Status=None
T1 T2 T3 T4 T5 T6 T7 T8 T9: "N-CHANNEL MOSFET WITH DIODE", Case=SOT23-3, Manufacturer="ON SEMICONDUCTOR", Author="CERN DEM JLC", Bonding=No, ComponentHeight=1.11mm, Component Type=Standard, CreateDate=23.03.2009, Device=BSS138LT1G, HelpURL=\\cern.ch\dfs\Applications\Altium\Datasheets\BSS138LT1G.pdf, LatestRevisionDate=23.03.2009, Manufacturer Part Number=BSS138LT1G, Mounted=Yes, PackageDescription="SOT23 3-Leads, Pitch 0.95mm - Body 1.4x3mm, IPC Medium Density", Part Description="50V 200mA N-Channel Enhancement Mode Field-Effect Transistor", Part Number=BSS138LT1G, Pin Count=3, PressFit=No, Sense=No, SMD=Yes, Socket=No
T10 T11: "N-CHANNEL MOSFET WITH DIODE", Case=SOT23-3, Manufacturer="ON SEMICONDUCTOR", Manufacturer Part Number=BSS138L, Author="CERN DEM JLC", Bonding=No, Component Type=Standard, ComponentHeight=1.11mm, CreateDate=23.03.2009, Device=BSS138LT1G, HelpURL=\\cern.ch\dfs\Applications\Altium\Datasheets\BSS138LT1G.pdf, LatestRevisionDate=25.05.2022, Mounted=Yes, PackageDescription="SOT23, 0.95mm Pitch; 3 Pin, 1.40mm W X 3.00mm L X 1.10mm H body, IPC Medium Density", Part Description="50V, 200mA N-Channel Enhancement Mode Field-Effect Transistor", Part Number=BSS138LT1G, Pin Count=3, PressFit=No, Sense=No, SMD=Yes, Socket=No
TP7 TP8 TP9 TP10 TP11 TP12 TP13: library part SMD_PAD_1.27X1.27MM, Author="CERN DEM JLC", ComponentHeight=0mm, Component Type="Standard (No BOM)", CreateDate=12.01.2008, Family="Test Point", HelpURL=Undefined, LatestRevisionDate=12.01.2008, Mounted=No, PackageDescription="1.27mm x 1.27mm PCB Copper Area (SMD Test Point)", Part Description="1.27mm x 1.27mm PCB Copper Area (SMD Test Point)", Part Number=SMD_PAD_1.27X1.27MM, Pin Count=1, Sense=No, SMD=Yes, Socket=No, Status=None
TP14 TP15: library part SMD_PAD_1.27X1.27MM, "Test Point", Author="CERN DEM JLC", Component Type="Standard (No BOM)", ComponentHeight=0mm, CreateDate=12.01.2008, Family="Test Point", HelpURL=Undefined, LatestRevisionDate=12.01.2008, Mounted=No, PackageDescription="1.27mm x 1.27mm PCB Copper Area (SMD Test Point)", Part Description="1.27mm x 1.27mm PCB Copper Area (SMD Test Point)", Part Number=SMD_PAD_1.27X1.27MM, Pin Count=1, Sense=No, SMD=Yes, Socket=No, Status=None
WASHER1 WASHER2 WASHER3 WASHER4: library part BOSSARD_BN678-1250191_v, "Washer", Manufacturer=BOSSARD, Manufacturer Part Number="BN678 Art.1250191", Author="CERN DEM JLC", Component Type=Mechanical, ComponentHeight=0.5mm, CreateDate=15.01.2013, HelpURL=\\cern.ch\dfs\Applications\Altium\Datasheets\BOSSARD_BN678-1250191.pdf, LatestRevisionDate=11.12.2013, Mounted=Yes, PackageDescription="Waved Spring Washer for M3 Screw, Stainless Steel A2 / 1.4310", Part Description="Waved Spring Washer for M3 Screw, Stainless Steel A2 / 1.4310", Part Number=BOSSARD_BN678-1250191_v, Pin Count=0, PressFit=No, Sense=No, SMD=No, Socket=No, Status=Obsolete, Status Comment="Replaced by BOSSARD_BN83728-8243964_v"

## Free pads (board coordinates)
  round 6 hole 3.2: 0(54.844,2.48) 1(54.844,87.48)

## Via types
v1: diameter 0.5, hole 0.2, Top to Bot, tented both sides, 704 vias
v2: diameter 0.5, hole 0.2, Top to Bot, 180 vias
v3: diameter 0.6, hole 0.3, Top to Bot, tented both sides, 17 vias
v4: diameter 1, hole 0.6, Top to Bot, tented both sides, 16 vias
v5: diameter 0.6, hole 0.3, Top to Bot, 6 vias
v6: diameter 1.27, hole 0.711, Top to Bot, 2 vias

## Nets (pads, with @x,y where several pads share a name; then routed paths per layer and width w, separated by ;. In a path a pad name is that pad's centre, name@x,y a point inside that pad or via, vN(x,y) a via of type N, cw(c..) or ccw(c..) an arc to the next point about the centre after c; other vN are vias at no path point)
ADC_CLKOUT_N: IC13.8 IC36.34 R20.2 | length 77
  Top w0.152: IC36.34@99.039,37.665 99.465,37.665 99.563,37.568 100.366,37.568 100.546,37.748 101.756,37.748 101.93,37.921 v1(102.019,37.921) ; v1(163.569,60.318) 164.054,60.318 R20.2@164.21,60.474 165.069,60.474 165.229,60.634 IC13.8@165.229,61.529
  Bot w0.152: v1(102.019,37.921) 102.108,37.921 102.282,37.748 103.413,37.748 103.593,37.568 104.484,37.568 105.938,39.023 117.123,39.023 118.105,40.005 140.455,40.005 157.4,56.95 159.688,56.95 161.12,58.383 162.894,60.157 163.408,60.157 v1(163.569,60.318)
ADC_CLKOUT_P: IC13.1 IC36.33 R20.1 | length 77
  Top w0.152: IC36.33@99.039,37.165 99.465,37.165 99.563,37.263 100.492,37.263 100.672,37.443 101.756,37.443 101.93,37.269 v1(102.019,37.269) ; v1(163.569,59.691) 164.054,59.691 R20.1@164.21,59.534 165.054,59.534 165.25,59.338 IC13.1@165.25,58.45
  Bot w0.152: v1(102.019,37.269) 102.108,37.269 102.282,37.443 103.287,37.443 103.466,37.263 104.61,37.263 106.065,38.718 117.249,38.718 118.231,39.7 140.581,39.7 157.526,56.645 159.814,56.645 161.425,58.256 163.021,59.852 163.408,59.852 v1(163.569,59.691)
ADC_IN_N0: L1A.2 P1.2 P5.23 R8A.1 SW1A.1 | length 88.3
  Top w0.203: P1.2@13.2,78.99 14.632,78.99 15.444,78.178 15.444,72.225 13.444,70.225 13.444,56.314 15.453,54.305 17.45,54.305 18.1,54.955 18.1,56.292 18.26,56.452 18.26,57.21 P5.23@19.2,58.15 21.6,58.15 23.419,59.969 23.419,71.463 25.316,73.36 28.44,73.36 29.276,74.196 29.276,80.453 30.413,81.59 34.366,81.59 38.826,77.13 44.517,77.13 45.76,78.373 L1A.2@45.76,79.304 47.948,79.304 R8A.1@48.964,78.288
ADC_IN_N1: J4.2 L1B.2 P5.20 R8B.1 SW1B.1 | length 90.8
  Top w0.203: J4.2@-0.2,69.65 J4.2@-0.2,77.25 ; P5.20@16.66,53.07 17.739,51.991 19.647,51.991 21.016,51.991 25.044,56.019 25.044,70.18 26.444,71.58 30.403,71.58 30.413,71.59 34.366,71.59 38.851,67.105 44.492,67.105 45.76,68.373 L1B.2@45.76,69.304 47.948,69.304 R8B.1@48.964,68.288
  Bot w0.203: J4.2@-0.2,69.65 7.45,69.65 9.2,67.9 9.2,56.614 12.744,53.07 P5.20@16.66,53.07
ADC_IN_N2: L1C.2 P1.6 P5.17 R8C.1 SW1C.1 | length 76.7
  Top w0.203: P1.6@13.2,73.91 11.694,72.404 11.694,48.519 13.333,46.88 17.24,46.88 18.146,47.786 18.146,49.476 P5.17@19.2,50.53 22.545,50.53 26.869,54.854 26.869,57.989 30.426,61.546 34.379,61.546 38.97,56.955 44.398,56.955 45.773,58.329 L1C.2@45.773,59.26 47.961,59.26 R8C.1@48.977,58.244
ADC_IN_N3: J5.2 L1D.2 P5.14 R8D.1 SW1D.1 | length 69
  Top w0.203: J5.2@-0.2,56.25 J5.2@-0.2,48.65 6.157,48.65 9.357,45.45 P5.14@16.66,45.45 17.76,44.35 24.63,44.35 25.32,45.04 25.32,51.104 26.046,51.83 30.173,51.83 30.413,51.59 34.366,51.59 38.851,47.105 44.492,47.105 45.76,48.373 L1D.2@45.76,49.304 47.948,49.304 R8D.1@48.964,48.288
ADC_IN_N4: L1E.2 P2.2 P5.11 R8E.1 SW1E.1 | length 46.1
  Top w0.203: P2.2@13.2,34.99 13.2,38.136 14.344,39.28 17.441,39.28 18.121,39.96 18.121,42.381 P5.11@18.65,42.91 ; P5.11@19.2,42.91 23.189,42.91 24.509,41.59 SW1E.1@30.986,41.59 34.366,41.59 38.876,37.08 44.467,37.08 45.76,38.373 L1E.2@45.76,39.304 47.948,39.304 R8E.1@48.964,38.288
ADC_IN_N5: J6.2 L1F.2 P5.8 R8F.1 SW1F.1 | length 73.5
  Top w0.203: J6.2@-0.2,27.65 J6.2@-0.2,35.25 ; P5.8@16.66,37.83 17.714,36.776 27.123,36.776 30.986,32.913 SW1F.1@30.986,31.59 34.366,31.59 38.776,27.18 44.567,27.18 45.76,28.373 L1F.2@45.76,29.304 47.948,29.304 R8F.1@48.964,28.288
  Bot w0.203: J6.2@-0.2,27.65 J6.2@-0.2,35.25 -0.2,37.049 0.581,37.83 P5.8@16.66,37.83
ADC_IN_N6: L1G.2 P2.6 P5.5 R8G.1 SW1G.1 | length 55.3
  Top w0.203: P2.6@13.2,29.91 13.2,30.89 13.71,31.4 17.26,31.4 18.16,32.3 18.146,32.314 18.146,33.186 18.16,33.2 18.16,34.75 18.7,35.29 20.63,35.29 23.303,35.29 24.17,34.423 24.17,24.204 26.784,21.59 34.366,21.59 38.751,17.205 44.592,17.205 45.76,18.373 L1G.2@45.76,19.304 47.948,19.304 R8G.1@48.964,18.288
ADC_IN_N7: J7.2 L1H.2 P5.2 R8H.1 SW1H.1 | length 84.4
  Top w0.203: J7.2@-0.195,6.65 J7.2@-0.195,14.25 -0.195,17.905 1.2,19.3 10.478,19.3 12.545,21.367 12.545,26.095 P5.2@16.66,30.21 18.87,28 18.87,23.313 25.733,16.45 29.43,16.45 30.986,14.894 SW1H.1@30.986,11.59 34.366,11.59 38.826,7.13 44.517,7.13 45.76,8.373 L1H.2@45.76,9.304 47.948,9.304 R8H.1@48.964,8.288
ADC_IN_P0: L1A.1 P1.1 P5.22 R1A.1 R5A.2 | length 91.2
  Top w0.203: P1.1@10.66,78.99 12.123,80.453 15.556,80.453 16.394,79.615 16.394,72.28 14.344,70.23 14.344,57.926 P5.22@16.66,55.61 16.66,55.76 17.825,56.925 17.825,58.771 18.349,59.295 21.07,59.295 22.53,60.755 22.53,71.65 25.06,74.18 28.414,74.18 28.946,74.712 28.946,82.133 29.649,82.836 38.65,82.836 40.077,84.263 42.652,84.263 R5A.2@42.694,84.305 ; L1A.1@45.76,81.844 47.961,81.844 48.847,82.73 48.847,82.743 R1A.1@48.964,82.86
  Top w0.762: R5A.2@42.694,84.305 45.294,84.305 45.76,83.839 L1A.1@45.76,81.844
ADC_IN_P1: J4.1 L1B.1 P5.19 R1B.1 R5B.2 | length 77.4
  Top w0.203: P5.19@18.545,53.07 20.63,53.07 24.638,57.078 24.638,70.348 26.422,72.133 28.946,72.133 29.649,72.836 38.825,72.836 40.294,74.305 42.544,74.305 42.619,74.23 R5B.2@42.694,74.305 ; L1B.1@45.76,71.844 47.961,71.844 48.847,72.73 48.847,72.743 R1B.1@48.964,72.86
  Top w0.762: R5B.2@42.694,74.305 45.319,74.305 45.76,73.864 L1B.1@45.76,71.844
  Bot w0.203: J4.1@7.6,73.45 10.5,70.55 10.5,57.485 13.685,54.3 17.97,54.3 P5.19@19.2,53.07